# Altium PCB USBC.PcbDoc
Units mm, origin at the board's own origin, x right, y up, seen from the top; angles counter-clockwise.
Board outline 23.9 x 69.4 mm, 2 copper layers (Top Layer, Bottom Layer), stack 0.77 mm thick; 42 components, 36 nets, 209 pads, 199 vias.
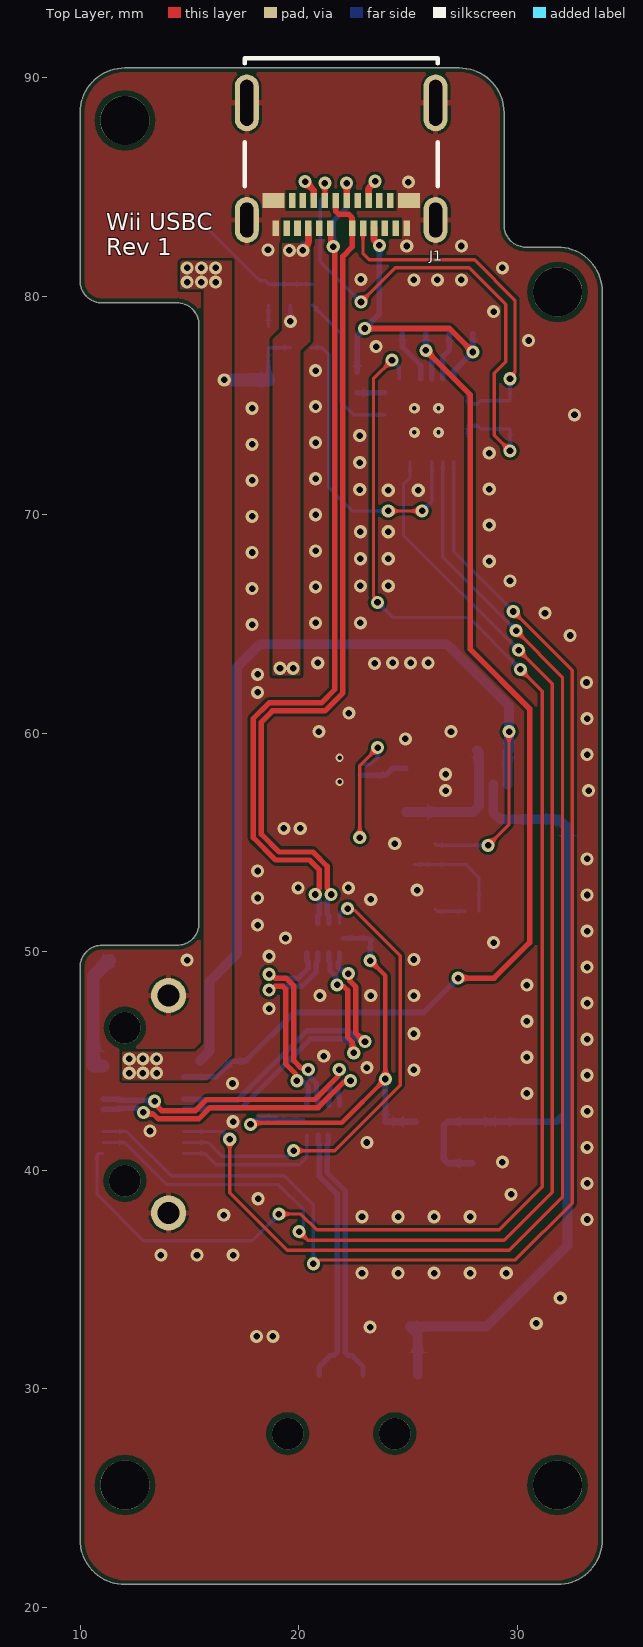
[diagram p0: Top Layer view]
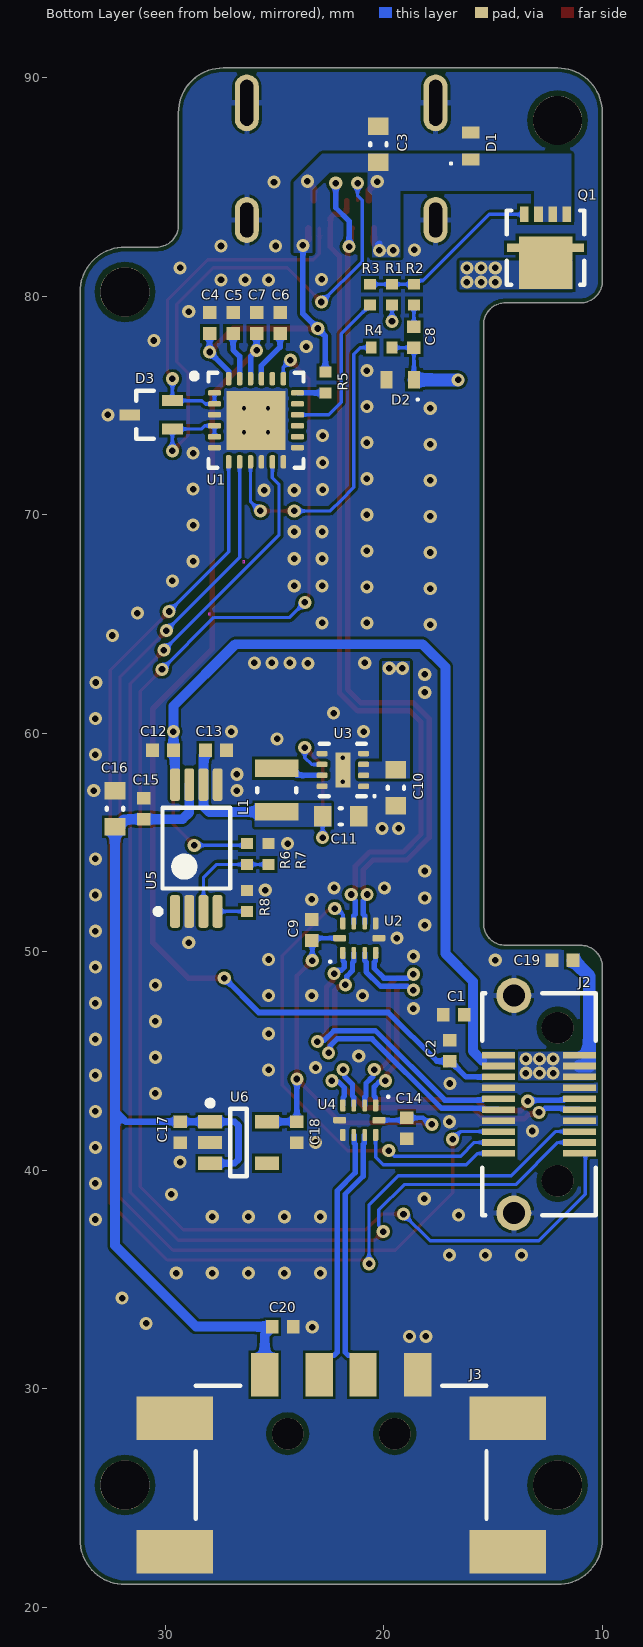
[diagram p1: Bottom Layer view, seen from below]
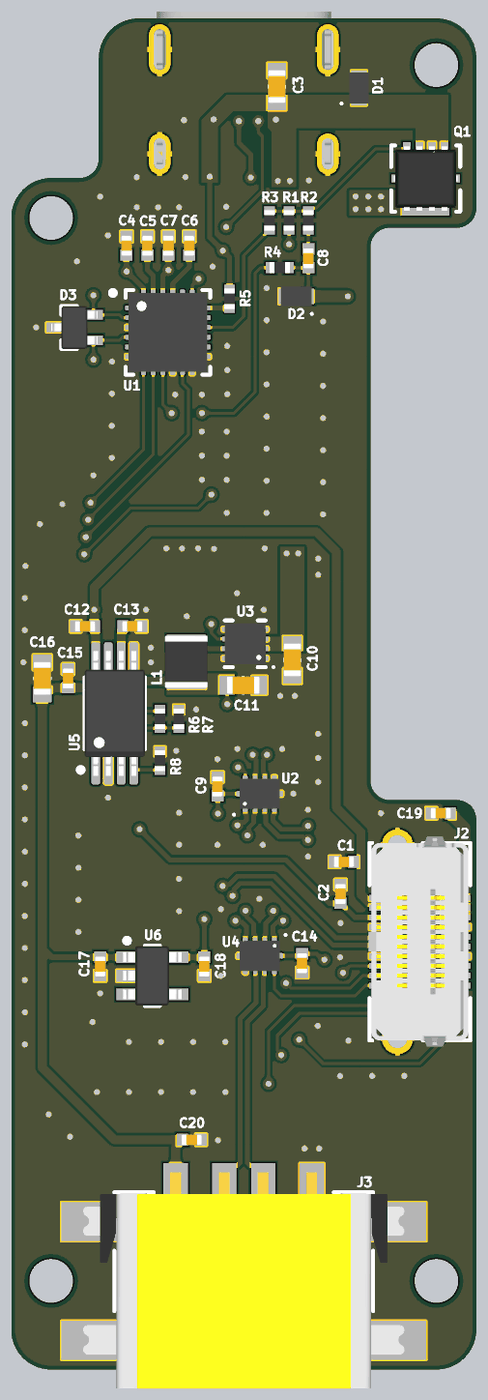
[diagram p2: 3D render of the assembled board from below, using the file's embedded part models]

## Layer stack, top to bottom
Top Solder: solder mask 0.0127, Solder Resist, Dk 3.8
Top Layer: signal copper 0.035
Dielectric: core 0.7, FR-4, Dk 4.5
Bottom Layer: signal copper 0.035
Bottom Solder: solder mask 0.0127, Solder Resist, Dk 3.8

## Board outline
10,23.1 10,49.3 cw(c11,49.3) 11,50.3 14.438,50.3 ccw(c14.438,51.3) 15.438,51.3 15.438,78.7 ccw(c14.438,78.7) 14.438,79.7 11,79.7 cw(c11,80.7) 10,80.7 10,88.4 cw(c12.05,88.4) 12.05,90.45 27.35,90.45 cw(c27.35,88.4) 29.4,88.4 29.4,83.25 ccw(c30.4,83.25) 30.4,82.25 31.85,82.25 cw(c31.85,80.2) 33.9,80.2 33.9,23.1 cw(c31.85,23.1) 31.85,21.05 12.05,21.05 cw(c12.05,23.1)

## Design rules (kind name [scope] priority, off if disabled: settings)
BoardOutlineClearance BoardOutlineClearance_Silk [OnLayer('Top Overlay') OR OnLayer('Bottom Overlay')] p1: gap=0 ignorepadtopadclearanceinfootprint=FALSE
BoardOutlineClearance [All] p2: gap=0.2 ignorepadtopadclearanceinfootprint=FALSE
Clearance [All] p1: gap=0.127 ignorepadtopadclearanceinfootprint=FALSE except(0.25: Arc-Hole Track-Hole SMDPad-Hole THPad-Hole Via-Hole Fill-Hole Poly-Hole Region-Hole Text-Hole)
ComponentClearance [All] p1: gap=0.127 collisioncheckmode=3 verticalgap=0.127 showdistances=TRUE
DiffPairsRouting DiffPairsRouting_USB [All] p1: maxlimit=0.254 minlimit=0.127 mostfreqgap=0.127 toplayer_minwidth=0.244 toplayer_maxwidth=0.381 toplayer_prefwidth=0.244 bottomlayer_minwidth=0.244 bottomlayer_maxwidth=0.381 bottomlayer_prefwidth=0.244 impedanceprofiledriven=TRUE impedanceprofileid={C5C9464D-4472-4F4D-9DE4-98FA9F9132ED} impedanceprofilevalue=90.000000 maxuncoupledlength=12.7
DiffPairsRouting [All] p2: maxlimit=0.254 minlimit=0.127 mostfreqgap=0.127 toplayer_minwidth=0.127 toplayer_maxwidth=25.4 toplayer_prefwidth=0.127 bottomlayer_minwidth=0.127 bottomlayer_maxwidth=25.4 bottomlayer_prefwidth=0.127 maxuncoupledlength=12.7
Height [All] p1: minheight=0 maxheight=1816.048 prefheight=12.7
HoleSize [All] p1: absolutevalues=TRUE maxlimit=6.3 minlimit=0.3 maxpercent=80.000 minpercent=20.000
HoleToHoleClearance [All] p1: gap=0.25 allowstackedmicrovias=FALSE
MinimumAnnularRing [All] p1: minimumring=0.076
MinimumSolderMaskSliver [All] p1: minsoldermaskwidth=0
PlaneClearance [All] p1: clearance=0.127
PlaneConnect PlaneConnectPowerPads [InPadClass('PowerPads')] p1: planeconnectstyle=Direct reliefexpansion=0.508 reliefentries=4 reliefconductorwidth=0.254 reliefairgap=0.254
PlaneConnect [All] p2: pad.planeconnectstyle=Relief pad.reliefexpansion=0.3 pad.reliefentries=4 pad.reliefconductorwidth=0.127 pad.reliefairgap=0.127 via.planeconnectstyle=Direct via.reliefexpansion=0.3 via.reliefentries=4 via.reliefconductorwidth=0.127 via.reliefairgap=0.127
PolygonConnect PolygonConnectPowerPads [All vs (InPadClass('PowerPads'))] p1: connectstyle=Direct reliefconductorwidth=0.254 reliefentries=4 polygonreliefangle="90 Angle" airgapwidth=0.254
PolygonConnect [All] p2: thpad.connectstyle=Relief thpad.reliefconductorwidth=0.254 thpad.reliefentries=4 thpad.polygonreliefangle="90 Angle" thpad.airgapwidth=0.127 smdpad.connectstyle=Direct smdpad.reliefconductorwidth=0.127 smdpad.reliefentries=4 smdpad.polygonreliefangle="90 Angle" smdpad.airgapwidth=0.127 via.connectstyle=Direct via.reliefconductorwidth=0.127 via.reliefentries=4 via.polygonreliefangle="90 Angle" via.airgapwidth=0.127
RoutingVias [All] p1: holewidth=0.3 width=0.6 viastyle="Through Hole" minholewidth=0.3 minwidth=0.6 maxholewidth=0.6 maxwidth=6.6
SilkToSilkClearance [All] p1: silktosilkclearance=0
SilkToSolderMaskClearance [IsPad] p1: minsilkscreentomaskgap=0.127 clearancetoexposedcopper=TRUE
SolderMaskExpansion SolderMaskExpansion_Via [isVia] p1: expansion=0.102 istentingtop=TRUE
SolderMaskExpansion [All] p2: expansion=0.075 istentingtop=FALSE
Width [All] p1: maxlimit=25.4 minlimit=0.127 preferedwidth=0.127 minimp=50.000000 maximp=50.000000 favimp=50.000000
20 further rules are at their usual default settings.

## Classes and differential pairs
component class "Room Definition 12": C4 C5 C6 C7 D3 R5 U1
component class "Room Definition 10": C12 C13 C15 C16 R6 R7 R8 U5
component class "Room Definition 8": C14
component class "Room Definition 6": C9 U2
component class "Room Definition 4": C17 C18 U6
component class "Room Definition 2": C10 C11 L1 U3
differential pair WII_DATA: +WII_DATA_P -WII_DATA_N
differential pair USBCTOA_DATA: +USBCTOA_DATA_P -USBCTOA_DATA_N
differential pair USBC_DATA: +USBC_DATA_P -USBC_DATA_N
differential pair USBA_DATA: +USBA_DATA_P -USBA_DATA_N
differential pair MCU_DATA: +MCU_DATA_P -MCU_DATA_N

## Components (designator, comment, footprint, x,y, rotation, side; value= is the part's Value field where it differs from the comment)
C1 "Capacitor" CAPC1005X06N 16.8,47.125 r180 bottom value=1uF
C2 "Capacitor" CAPC1005X06N 16.975,45.475 r270 bottom value=0.1uF
C3 "Capacitor" CAPC1608X09N 20.25,86.95 r270 bottom value=4.7uF
C4 "Capacitor" CAPC1005X06N 27.975,78.775 r270 bottom value=1uF
C5 "Capacitor" CAPC1005X06N 26.9,78.775 r270 bottom value=1uF
C6 "Capacitor" CAPC1005X06N 24.75,78.775 r270 bottom value=1uF
C7 "Capacitor" CAPC1005X06N 25.825,78.775 r270 bottom value=1uF
C8 "Capacitor" CAPC1005X06N 18.625,78.125 r90 bottom value=0.1uF
C9 "Capacitor" CAPC1005X06N 23.3,51 r270 bottom value=0.1uF
C10 "Capacitor" CAPC1608X09N 19.45,57.5 r90 bottom value=10uF
C11 "Capacitor" CAPC1608X09N 21.975,56.2 r0 bottom value=22uF
C12 "Capacitor" CAPC1005X06N 30.105,59.225 r180 bottom value=0.1uF
C13 "Capacitor" CAPC1005X06N 27.68,59.225 r0 bottom value=0.1uF
C14 "Capacitor" CAPC1005X06N 18.95,41.92 r90 bottom value=0.1uF
C15 "Capacitor" CAPC1005X06N 30.98,56.55 r270 bottom value=0.1uF
C16 "Capacitor" CAPC1608X09N 32.305,56.55 r270 bottom value=10uF
C17 "Capacitor" CAPC1005X06N 29.325,41.75 r90 bottom value=1uF
C18 "Capacitor" CAPC1005X06N 23.975,41.75 r90 bottom value=1uF
C19 "Capacitor" CAPC1005X06N 11.825,49.625 r180 bottom value=1uF
C20 "Capacitor" CAPC1005X06N 24.625,32.85 r0 bottom value=1uF
D1 "ESDA25P35-1U1M" DFN105P160X60-2N 16.025,86.875 r90 bottom
D2 "ESDA25P35-1U1M" DFN105P160X60-2N 19.25,76.175 r0 bottom
D3 "ESDA25W" SOT65P210X110-3N 30.65,74.575 r0 bottom
J1 "105450-0101" 1054500101 21.95,86.85 r180 top
J2 "LSHM-110-02.5-L-DV-A-S-K-TR" LSHM-110-02.5-L-DV-A-S 12.9,43.025 r90 bottom
J3 "629104190121" 629104190121 21.95,25.05 r180 bottom
L1 "CIGT252010EH2R2MNE" INDC2520X10N 24.9,57.4 r270 bottom
Q1 "STL6P3LLH6" QFN0P315X300X90-10N 12.6,82.225 r0 bottom
R1 "Resistor" RESC1005X04N 19.625,80.075 r270 bottom value=100K
R2 "Resistor" RESC1005X04N 18.625,80.075 r90 bottom value=100
R3 "Resistor" RESC1005X04N 20.625,80.075 r90 bottom value=22k
R4 "Resistor" RESC1005X04N 20.1,77.65 r0 bottom value=1k
R5 "Resistor" RESC1005X04N 22.675,76.05 r90 bottom value=1k
R6 "Resistor" RESC1005X04N 26.255,54.475 r90 bottom value=100k
R7 "Resistor" RESC1005X04N 25.28,54.475 r270 bottom value=24.3k
R8 "Resistor" RESC1005X04N 26.255,52.325 r270 bottom value=500
U1 "STUSB4500QTR" QFN50P400X400X100_HS-25N 25.85,74.325 r180 bottom
U2 "TS3USB221RSER" QFN50P150X200X60-10N 21.125,50.625 r90 bottom
U3 "TPS62163DSGR" SON50P200X80_HS-9N 21.875,58.325 r0 bottom
U4 "TS3USB221RSER" QFN50P150X200X60-10N 21.125,42.295 r270 bottom
U5 "TPS2110APWR" TSOP65P640X120-8N 28.58,54.75 r90 bottom
U6 "TLV75533PDBVR" SOT95P280X145-5N 26.65,41.275 r180 bottom

## Footprints (in the part's own frame and the unit in brackets; to place one, negate y for a bottom-side part, rotate by r counter-clockwise, add the part's x,y. Pads: shape width x height; smd on the part's side, far side on the other; paste and mask are expansions set on the pad)
1054500101 [mm] "CONN RCP USB3.1 TYPEC 24P SMD RA"
  rect 0.3x0.7 smd: A1(-3,3.74) A2(-2.5,3.74) A3(-2,3.74) A4(-1.5,3.74) A5(-1,3.74) A6(-0.5,3.74) A7(0.5,3.74) A8(1,3.74) A9(1.5,3.74) A10(2,3.74) A11(2.5,3.74) A12(3,3.74) B2(2.25,2.47) B3(1.75,2.47) B4(1.25,2.47) B5(0.75,2.47) B6(0.25,2.47) B7(-0.25,2.47) B8(-0.75,2.47) B9(-1.25,2.47) B10(-1.75,2.47) B11(-2.25,2.47)
  rect 1x0.7 smd: B1(3.1,2.47) B12(-3.1,2.47)
  oval 1.1x2.1 hole 1.6 slot 0.6 at 0 deg: SHIELD(-4.32,3.36) SHIELD(4.32,3.36)
  oval 1.1x2.6 hole 2.1 slot 0.6 at 0 deg: SHIELD(-4.32,-2) SHIELD(4.32,-2)
  silkscreen extent -4.42,-4.05 4.42,1.81, body extent -4.47,-3.95 4.47,3.95, height 3.2
629104190121 [mm] "CONN RCPT USB2.0 TYPEA 4P SMD RA"
  rect 1.25x2 smd: 1(-3.5,5.6) 2(-1,5.6) 3(1,5.6) 4(3.5,5.6)
  rect 3.5x2 smd: SHIELD(-7.625,-2.5) SHIELD(-7.625,3.6) SHIELD(7.625,-2.5) SHIELD(7.625,3.6)
  round 1.45 hole 1.45 unplated: ""(-2.45,2.9) ""(2.45,2.9)
  silkscreen extent -6.65,-1 6.65,5.1, body extent -8.25,-4.98 8.25,6.13, height 6.32
CAPC1005X06N [mm] "Chip Capacitor, 2-Leads, Body 1.00x0.50mm, IPC Medium Density"
  rect 0.58x0.62 smd: 1(-0.48,0) 2(0.48,0)
  body extent -0.53,-0.28 0.53,0.27, height 0.55
CAPC1608X09N [mm] "Chip Capacitor, 2-Leads, Body 1.60x0.80mm, IPC Medium Density"
  rect 0.8x0.95 smd: 1(-0.825,0) 2(0.825,0)
  silkscreen extent -0.05,-0.38 0.05,0.38, body extent -0.85,-0.45 0.85,0.45, height 0.9
DFN105P160X60-2N [mm] "DFN, 2-Leads, Body 1.00x1.60mm, Pitch 1.05mm, IPC Medium Density"
  rect 0.55x0.8 smd: 1(-0.625,0) 2(0.625,0)
  silkscreen extent -0.85,0.85 -0.75,0.95, body extent -0.8,-0.5 0.8,0.5, height 0.6
INDC2520X10N [mm] "Chip Inductor, 2-Leads, Body 2.50x2.00mm, IPC Medium Density"
  rect 0.8x2 smd: 1(-1,0) 2(1,0)
  silkscreen extent -0.1,-0.9 0.1,0.9, body extent -1.35,-1.1 1.35,1.1, height 1
LSHM-110-02.5-L-DV-A-S [mm] "CONN SELF-MATE 20POS SMD GOLD"
  rect 0.3x1.5 smd: 1(2.25,-1.85) 2(2.25,1.85) 3(1.75,-1.85) 4(1.75,1.85) 5(1.25,-1.85) 6(1.25,1.85) 7(0.75,-1.85) 8(0.75,1.85) 9(0.25,-1.85) 10(0.25,1.85) 11(-0.25,-1.85) 12(-0.25,1.85) 13(-0.75,-1.85) 14(-0.75,1.85) 15(-1.25,-1.85) 16(-1.25,1.85) 17(-1.75,-1.85) 18(-1.75,1.85) 19(-2.25,-1.85) 20(-2.25,1.85)
  round 1.6 hole 1: SHIELD(-4.975,1.15) SHIELD(4.975,1.15)
  round 1.45 hole 1.45 unplated: ""(-3.5,-0.85) ""(3.5,-0.85)
  silkscreen extent -5.07,-2.59 5.07,2.59, body extent -5.4,-2.49 5.4,2.64, height 3.93
QFN0P315X300X90-10N [mm] "QFN, 10-Leads, Body 3.15x3.00mm, Pitch 0.65mm/0.00mm, IPC Medium Density"
  rect 0.4x0.7 smd: 1(-0.975,-1.525) 2(-0.325,-1.525) 3(0.325,-1.525) 4(0.975,-1.525) 5(0.975,1.525) 6(0.325,1.525) 7(-0.325,1.525) 8(-0.975,1.525)
  rect 0.7x0.4 smd: 5(-1.405,0) 5(1.405,0)
  rect 2.45x2.4 smd: 5(0,0.7)
  silkscreen extent -1.78,-1.7 1.78,1.7, body extent -1.65,-1.65 1.65,1.65, height 0.8
QFN50P150X200X60-10N [mm] "QFN, 10-Leads, Body 1.50x2.00mm, Pitch 0.50mm, IPC Medium Density"
  rrect50% 0.55x0.25 smd: 1(-0.675,0.75) 4(-0.675,-0.75) 6(0.675,-0.75) 9(0.675,0.75)
  rrect50% 0.55x0.2 smd: 2(-0.675,0.25) 3(-0.675,-0.25) 7(0.675,-0.25) 8(0.675,0.25)
  rrect50% 0.3x0.6 smd: 5(0,-0.9) 10(0,0.9)
  silkscreen extent -1.12,1.28 -1.03,1.38, body extent -0.78,-1.03 0.78,1.03, height 0.6
QFN50P400X400X100_HS-25N [mm] "QFN, 24-Leads, Body 4.00x4.00mm, Pitch 0.50mm, Thermal Pad 2.70x2.70mm, IPC Medium Density"
  rrect50% 0.6x0.25 smd: 1(-1.9,1.25) 2(-1.9,0.75) 3(-1.9,0.25) 4(-1.9,-0.25) 5(-1.9,-0.75) 6(-1.9,-1.25) 13(1.9,-1.25) 14(1.9,-0.75) 15(1.9,-0.25) 16(1.9,0.25) 17(1.9,0.75) 18(1.9,1.25)
  rrect50% 0.25x0.6 smd: 7(-1.25,-1.9) 8(-0.75,-1.9) 9(-0.25,-1.9) 10(0.25,-1.9) 11(0.75,-1.9) 12(1.25,-1.9) 19(1.25,1.9) 20(0.75,1.9) 21(0.25,1.9) 22(-0.25,1.9) 23(-0.75,1.9) 24(-1.25,1.9)
  rect 2.7x2.7 smd: 25(0,0)
  silkscreen extent -2.95,-2.18 2.18,2.17, body extent -2.03,-2.03 2.03,2.03, height 1
RESC1005X04N [mm] "Chip Resistor, 2-Leads, Body 1.00x0.50mm, IPC Medium Density"
  rect 0.5x0.55 smd: 1(-0.475,0) 2(0.475,0)
  body extent -0.52,-0.28 0.53,0.27, height 0.4
SON50P200X80_HS-9N [mm] "SON, 8-Leads, Body 2.00x2.00mm, Pitch 0.50mm, Thermal Pad 1.60x0.69mm, IPC Medium Density"
  rrect50% 0.5x0.25 smd mask+0.07: 1(-0.95,0.75) 2(-0.95,0.25) 3(-0.95,-0.25) 4(-0.95,-0.75) 5(0.95,-0.75) 6(0.95,-0.25) 7(0.95,0.25) 8(0.95,0.75)
  rect 0.69x1.6 smd mask+0.07: 9(0,0)
  silkscreen extent -1.5,-1.2 1.05,1.25, body extent -1.05,-1.05 1.05,1.05, height 0.8
SOT65P210X110-3N [mm] "SOT23, 3-Leads, Body 2.00x2.10mm, Pitch 0.65mm, IPC Medium Density"
  rect 0.95x0.5 smd: 1(-0.975,0.65) 2(-0.975,-0.65) 3(0.975,0)
  silkscreen extent -0.13,-1.1 0.67,1.1, body extent -1.2,-1.1 1.2,1.1, height 1.1
SOT95P280X145-5N [mm] "SOT23, 5-Leads, Body 2.90x2.80mm, Pitch 0.95mm, IPC Medium Density"
  rect 1.1x0.6 smd: 1(-1.3,0.95) 2(-1.3,0) 3(-1.3,-0.95) 4(1.3,-0.95) 5(1.3,0.95)
  silkscreen extent -1.43,-1.55 0.38,1.92, body extent -1.5,-1.53 1.5,1.53, height 1.45
TSOP65P640X120-8N [mm] "TSOP, 8-Leads, Body 3.00x4.40mm, Pitch 0.65mm, IPC Medium Density"
  rrect50% 1.5x0.45 smd: 1(-2.9,0.975) 2(-2.9,0.325) 3(-2.9,-0.325) 4(-2.9,-0.975) 5(2.9,-0.975) 6(2.9,-0.325) 7(2.9,0.325) 8(2.9,0.975)
  silkscreen extent -3.02,-1.55 1.85,1.88, body extent -3.2,-1.55 3.2,1.55, height 1.2

## Part data
C1 C2 C4 C5 C6 C7 C8 C9 C12 C13 C14 C15 C17 C18 C19 C20: "General purpose capacitor", Package=0402, Rated Voltage=25V
C3 C10 C16: "General purpose capacitor", Package=0603, Rated Voltage=25V
C11: "General purpose capacitor", Package=0603, Rated Voltage=10V
D1 D2: "STMICROELECTRONICS - ESDA25P35-1U1M - ESD Protection Device, Unidirectional, 41 V, QFN, 2 Pins", Case/Package=1610, Clamping Voltage=41V, Manufacturer=STMicroelectronics, Max Operating Temperature=150°C, Min Breakdown Voltage=23.3V, Min Operating Temperature=-55°C, Peak Pulse Current=35A, Peak Pulse Power=1.4kW, Power Line Protection=No, Reverse Standoff Voltage=22V, Category="TVS Diodes", ComponentLink1Description=http://www.farnell.com/datasheets/2236209.pdf?src-supplier=Farnell, ComponentLink1URL=http://www.farnell.com/datasheets/2236209.pdf?src-supplier=Farnell, ComponentLink2Description=http://www.st.com/content/ccc/resource/technical/document/datasheet/group3/e4/43/53/b9/4e/8a/40/bb/DM00312034/files/DM00312034.pdf/jcr:content/translations/en.DM00312034.pdf?src-supplier=Digi-Key, ComponentLink2URL=http://www.st.com/content/ccc/resource/technical/document/datasheet/group3/e4/43/53/b9/4e/8a/40/bb/DM00312034/files/DM00312034.pdf/jcr:content/translations/en.DM00312034.pdf?src-supplier=Digi-Key, ComponentLink3Description=http://www.farnell.com/datasheets/2236209.pdf?src-supplier=Element14, ComponentLink3URL=http://www.farnell.com/datasheets/2236209.pdf?src-supplier=Element14, ComponentLink4Description=http://www.farnell.com/datasheets/2236209.pdf?src-supplier=Newark, ComponentLink4URL=http://www.farnell.com/datasheets/2236209.pdf?src-supplier=Newark, Composition=Zener, Manufacturer Part Number=ESDA25P35-1U1M, Mount="Surface Mount", Number of Pins=2, Number of Unidirectional Channels=1, Packaging="Tape and Reel", Pricing 1="1=0.45000, 10=0.36200, 25=0.33120, 100=0.20790, 250=0.20560, 500=0.19250, 1000=0.13090, 2500=0.12551 (USD)", RoHS=No, Stock 1=4234, Supplier 1=Digi-Key
D3: "STMICROELECTRONICS - ESDA25W - ESD Protection Device, Array, SOT-323, 3 Pins, 1.2 V, 400 W, ESDA2 Series", Breakdown Voltage=25V, Capacitance=65pF, Case/Package=SOT-323, Leakage Current=1uA, Manufacturer=STMicroelectronics, Max Breakdown Voltage=30V, Max Operating Temperature=125°C, Max Power Dissipation=400W, Min Operating Temperature=-40°C, Operating Supply Voltage=1.2V, Package Quantity=1, Power Line Protection=No, Reverse Standoff Voltage=24V, Test Current=1mA, Category="Integrated Circuits (ICs)", ComponentLink1Description=https://datasheet.ciiva.com/15143/getdatasheetpartid-144665-15143734.pdf?src-supplier=Verical, ComponentLink1URL=https://datasheet.ciiva.com/15143/getdatasheetpartid-144665-15143734.pdf?src-supplier=Verical, ComponentLink2Description=https://datasheet.ciiva.com/16216/cd00064033-16216903.pdf?src-supplier=Future+Electronics, ComponentLink2URL=https://datasheet.ciiva.com/16216/cd00064033-16216903.pdf?src-supplier=Future+Electronics, ComponentLink3Description=https://datasheet.ciiva.com/26787/esda25w-26787589.pdf?src-supplier=IIIC, ComponentLink3URL=https://datasheet.ciiva.com/26787/esda25w-26787589.pdf?src-supplier=IIIC, ComponentLink4Description=https://datasheet.ciiva.com/338/cd00064033-338272.pdf?src-supplier=Digi-Key, ComponentLink4URL=https://datasheet.ciiva.com/338/cd00064033-338272.pdf?src-supplier=Digi-Key, ComponentLink5Description=https://datasheet.ciiva.com/338/cd00064033-338273.pdf?src-supplier=Digi-Key, ComponentLink5URL=https://datasheet.ciiva.com/338/cd00064033-338273.pdf?src-supplier=Digi-Key, ComponentLink6Description=https://datasheet.ciiva.com/4510/cd00064033-4510575.pdf?src-supplier=Mouser, ComponentLink6URL=https://datasheet.ciiva.com/4510/cd00064033-4510575.pdf?src-supplier=Mouser, ComponentLink7Description=https://datasheet.ciiva.com/28474/1671027-28474846.pdf?src-supplier=Element14, ComponentLink7URL=https://datasheet.ciiva.com/28474/1671027-28474846.pdf?src-supplier=Element14, ComponentLink8Description=https://datasheet.ciiva.com/338/cd00064033-338271.pdf?src-supplier=Digi-Key, ComponentLink8URL=https://datasheet.ciiva.com/338/cd00064033-338271.pdf?src-supplier=Digi-Key, Composition=Zener, Depth=1.25mm, Direction=Unidirectional, Element Configuration="Common Anode", ESD Protection=Yes, Height=1.1mm, Lead Free="Lead Free", Length=2mm, Manufacturer Part Number=ESDA25W, Max Reverse Leakage Current=1uA, Min Breakdown Voltage=25V, Mount="Surface Mount", Number of Channels=2, Number of Elements=2, Number of Pins=3, Number of Unidirectional Channels=2, Packaging="Tape and Reel", Peak Pulse Power=400W, Polarity=Unidirectional, Pricing 1="1=0.40000, 10=0.32600, 25=0.29800, 100=0.18710, 250=0.18504, 500=0.17326, 1000=0.11781 (USD)", Radiation Hardening=No, REACH SVHC="No SVHC", Reverse Breakdown Voltage=25V, RoHS=Yes, Supplier 1=Digi-Key, Termination=SMD/SMT, Voltage Rating (DC)=25V, Width=1.25mm, Working Voltage=24V
J1: "USB Shielded I/O Receptacle; Type C; Right Angle; Surface Mount; Gold over Nickel", Case/Package=0101, Current Rating=5A, Flammability Rating="UL94 V-0", Insulation Color=Black, Manufacturer=Molex, Max Operating Temperature=85°C, Min Operating Temperature=-30°C, Category=Connectors, ComponentLink1Description=http://www.farnell.com/datasheets/2801634.pdf?src-supplier=Farnell, ComponentLink1URL=http://www.farnell.com/datasheets/2801634.pdf?src-supplier=Farnell, ComponentLink2Description=http://www.farnell.com/datasheets/2672741.pdf?src-supplier=Newark, ComponentLink2URL=http://www.farnell.com/datasheets/2672741.pdf?src-supplier=Newark, ComponentLink3Description=http://www.farnell.com/datasheets/2015275.pdf?src-supplier=Element14, ComponentLink3URL=http://www.farnell.com/datasheets/2015275.pdf?src-supplier=Element14, ComponentLink4Description=https://www.molex.com/pdm_docs/ps/PS-105448-001.pdf?src-supplier=Digi-Key, ComponentLink4URL=https://www.molex.com/pdm_docs/ps/PS-105448-001.pdf?src-supplier=Digi-Key, ComponentLink5Description=http://www.farnell.com/datasheets/2801634.pdf?src-supplier=Newark, ComponentLink5URL=http://www.farnell.com/datasheets/2801634.pdf?src-supplier=Newark, ComponentLink6Description=https://www.molex.com/pdm_docs/sd/1054500101_sd.pdf?src-supplier=Digi-Key, ComponentLink6URL=https://www.molex.com/pdm_docs/sd/1054500101_sd.pdf?src-supplier=Digi-Key, ComponentLink7Description=http://www.farnell.com/datasheets/2801634.pdf?src-supplier=Element14, ComponentLink7URL=http://www.farnell.com/datasheets/2801634.pdf?src-supplier=Element14, ComponentLink8Description=http://www.literature.molex.com/SQLImages/kelmscott/Molex/PDF_Images/987651-4081.PDF?src-supplier=Avnet, ComponentLink8URL=http://www.literature.molex.com/SQLImages/kelmscott/Molex/PDF_Images/987651-4081.PDF?src-supplier=Avnet, ComponentLink9Description=http://www.literature.molex.com/SQLImages/kelmscott/Molex/PDF_Images/987651-4081.PDF?src-supplier=Avnet+Asia, ComponentLink9URL=http://www.literature.molex.com/SQLImages/kelmscott/Molex/PDF_Images/987651-4081.PDF?src-supplier=Avnet+Asia, Connector Type=USB, Contact Material="Copper Alloy", Contact Plating=Gold, Features=Shielded, Gender=Receptacle, Housing Material=Thermoplastic, Length=8.94mm, Manufacturer Part Number=105450-0101, Mating Cycles=10000, Mount="Surface Mount,Through Hole,Horizontal", Number of Contacts=24, Number of Pins=24, Number of Ports=1, Number of Terminals=24, Orientation="Right Angle", Packaging="Tape and Reel", Pitch=0.5mm, Pricing 1="1=2.15000, 10=1.94900, 25=1.82960, 50=1.75000, 100=1.67050, 250=1.51140, 500=1.39208 (USD)", REACH SVHC=Unknown, RoHS=Yes, Shielding=Shielded, Stock 1=5403, Supplier 1=Digi-Key, Termination=Solder, USB Standard="USB 3.1"
J2: "HERMAPHRODITIC 0.50MM SMD 20POS 2.5MM", Manufacturer=Samtec, ComponentLink1Description=http://suddendocs.samtec.com/prints/lshm-1xx-xx.x-xx-dv-a-x-x-tr-mkt.pdf?src-supplier=Digi-Key, ComponentLink1URL=http://suddendocs.samtec.com/prints/lshm-1xx-xx.x-xx-dv-a-x-x-tr-mkt.pdf?src-supplier=Digi-Key, Connector Type=Non-Gendered, Contact Plating=Gold, Features=Shielded, Manufacturer Part Number=LSHM-110-02.5-L-DV-A-S-K-TR, Mated Stacking Heights=8.5mm, Mount="Surface Mount", Number of Positions=20, Number of Rows=2, Packaging="Tape and Reel", Pricing 1="1=5.89000, 10=5.65000, 25=5.17880, 50=4.94340, 100=4.70800, 250=4.11952 (USD)", RoHS=No, Stock 1=1318, Supplier 1=Digi-Key
J3: "WURTH ELEKTRONIK - 629104190121 - USB Connector, USB Type A, USB 2.0, Receptacle, 4 Positions, Surface Mount, Horizontal", Current Rating=1.5A, Flammability Rating="UL94 V-0", Insulation Color=Black, Manufacturer="Wurth Electronics", Max Operating Temperature=85°C, Min Operating Temperature=-40°C, ComponentLink1Description=https://katalog.we-online.de/em/datasheet/629104190121.pdf?src-supplier=Digi-Key, ComponentLink1URL=https://katalog.we-online.de/em/datasheet/629104190121.pdf?src-supplier=Digi-Key, Connector Type=USB, Contact Plating=Gold, Gender=Receptacle, Manufacturer Part Number=629104190121, Mating Cycles=1500, Mount="Surface Mount", Number of Contacts=4, Number of Ports=1, Packaging="Cut Tape", Pricing 1="1=1.41000, 10=1.18000, 50=1.03000, 100=0.94000 (USD)", RoHS=No, Shielding=Shielded, Stock 1=8348, Supplier 1=Digi-Key, Termination=Solder
L1: "FIXED IND 2.2UH 2.4A 80MOHM SMD", Case Code (Imperial)=1008, Case Code (Metric)=2520, Current Rating=2.4A, DC Resistance (DCR)=80mR, Inductance=2.2uH, Manufacturer=Samsung, Max Operating Temperature=125°C, Min Operating Temperature=-40°C, Saturation Current=2.7A, Test Frequency=1MHz, Tolerance=20%, Case/Package=1008, ComponentLink1Description=http://www.samsungsem.com/kr/support/product-search/inductor/CIGT252010EH2R2MNE.jsp?src-supplier=Digi-Key, ComponentLink1URL=http://www.samsungsem.com/kr/support/product-search/inductor/CIGT252010EH2R2MNE.jsp?src-supplier=Digi-Key, Composition="Thin Film", Core Material=Metal,Composite, Manufacturer Part Number=CIGT252010EH2R2MNE, Mount="Surface Mount", Packaging="Tape and Reel", Pricing 1="1=0.28000, 10=0.25300, 100=0.17390, 500=0.14864, 1000=0.11385 (USD)", RoHS=No, Shielding=Unshielded, Stock 1=35283, Supplier 1=Digi-Key
Q1: "MOSFET POWER MOSFET", Continuous Drain Current (ID)=6A, Drain to Source Voltage (Vdss)=30V, Input Capacitance=1.45nF, Manufacturer=STMicroelectronics, Max Power Dissipation=2.9W, Category=MOSFETs, ComponentLink1Description=http://www.mouser.com/ds/2/389/stl6p3llh6-956152.pdf?src-supplier=Mouser, ComponentLink1URL=http://www.mouser.com/ds/2/389/stl6p3llh6-956152.pdf?src-supplier=Mouser, ComponentLink2Description=http://www.st.com/content/ccc/resource/technical/document/datasheet/3c/90/16/29/a8/76/48/02/DM00064617.pdf/files/DM00064617.pdf/jcr:content/translations/en.DM00064617.pdf?src-supplier=Digi-Key, ComponentLink2URL=http://www.st.com/content/ccc/resource/technical/document/datasheet/3c/90/16/29/a8/76/48/02/DM00064617.pdf/files/DM00064617.pdf/jcr:content/translations/en.DM00064617.pdf?src-supplier=Digi-Key, ComponentLink3Description=http://www.st.com/st-web-ui/static/active/en/resource/technical/document/datasheet/DM00064617.pdf?src-supplier=Avnet, ComponentLink3URL=http://www.st.com/st-web-ui/static/active/en/resource/technical/document/datasheet/DM00064617.pdf?src-supplier=Avnet, Lead Free="Lead Free", Manufacturer Part Number=STL6P3LLH6, Mount="Surface Mount", Number of Pins=8, Packaging="Tape and Reel", Pricing 1="1=1.45000, 10=1.29800, 25=1.23200, 100=0.92400, 250=0.91520, 500=0.78320, 1000=0.63800 (USD)", Rds On Max=30mR, RoHS=Yes, Stock 1=129, Supplier 1=Digi-Key
R1 R2 R3 R4 R5 R6 R7 R8: "General purpose resistor", Package=0402
U1: "STAND-ALONE USB PD CONTROLLER (", Case/Package=QFN, Manufacturer=STMicroelectronics, Max Operating Temperature=105°C, Min Operating Temperature=-40°C, ComponentLink1Description=http://www.farnell.com/datasheets/2710898.pdf?src-supplier=Farnell, ComponentLink1URL=http://www.farnell.com/datasheets/2710898.pdf?src-supplier=Farnell, ComponentLink2Description=http://www.farnell.com/datasheets/2710898.pdf?src-supplier=Newark, ComponentLink2URL=http://www.farnell.com/datasheets/2710898.pdf?src-supplier=Newark, ComponentLink3Description=http://www.st.com/content/ccc/resource/technical/document/datasheet/group3/1c/4a/55/d7/17/01/44/86/DM00489312/files/DM00489312.pdf/jcr:content/translations/en.DM00489312.pdf?src-supplier=Digi-Key, ComponentLink3URL=http://www.st.com/content/ccc/resource/technical/document/datasheet/group3/1c/4a/55/d7/17/01/44/86/DM00489312/files/DM00489312.pdf/jcr:content/translations/en.DM00489312.pdf?src-supplier=Digi-Key, ComponentLink4Description=http://www.farnell.com/datasheets/2710898.pdf?src-supplier=Element14, ComponentLink4URL=http://www.farnell.com/datasheets/2710898.pdf?src-supplier=Element14, Interface=I2C, Manufacturer Part Number=STUSB4500QTR, Packaging="Tape and Reel", Pricing 1="1=2.11000, 10=1.79000, 100=1.43000, 500=1.25000, 1000=1.04000, 4000=0.93500, 8000=0.89900, 24000=0.86400 (USD)", RoHS=No, Stock 1=6187, Supplier 1=Mouser
U2 U4: "TEXAS INSTRUMENTS         TS3USB221RSER.             USB SWITCH, 480MBPS, 1.1GHZ, QFN-10", Case/Package=QFN, High Level Output Current=64mA, Manufacturer="Texas Instruments", Max Operating Temperature=85°C, Max Supply Voltage=3.6V, Min Operating Temperature=-40°C, Min Supply Voltage=2.3V, Nominal Supply Current=30uA, On-State Resistance=6R, Operating Supply Voltage=3V, Package Quantity=1, Bandwidth=1.1GHz, Category="USB Interface ICs", ComponentLink1Description=https://datasheet.ciiva.com/4924/scds220g-126796-4924322.pdf?src-supplier=Mouser, ComponentLink1URL=https://datasheet.ciiva.com/4924/scds220g-126796-4924322.pdf?src-supplier=Mouser, ComponentLink2Description=https://datasheet.ciiva.com/1505/1805933-1505289.pdf?src-supplier=Element14, ComponentLink2URL=https://datasheet.ciiva.com/1505/1805933-1505289.pdf?src-supplier=Element14, ComponentLink3Description=https://datasheet.ciiva.com/15126/getdatasheetpartid-48047-15126909.pdf?src-supplier=Verical, ComponentLink3URL=https://datasheet.ciiva.com/15126/getdatasheetpartid-48047-15126909.pdf?src-supplier=Verical, ComponentLink4Description=https://datasheet.ciiva.com/41461/001187309-da-01-en-ic-usb-switch-ts3usb221rser-uqfn-10-tid-41461683.pdf?src-supplier=Conrad, ComponentLink4URL=https://datasheet.ciiva.com/41461/001187309-da-01-en-ic-usb-switch-ts3usb221rser-uqfn-10-tid-41461683.pdf?src-supplier=Conrad, ComponentLink5Description=https://datasheet.ciiva.com/1672/ts3usb221-1672054.pdf?src-supplier=Digi-Key, ComponentLink5URL=https://datasheet.ciiva.com/1672/ts3usb221-1672054.pdf?src-supplier=Digi-Key, ComponentLink6Description=https://datasheet.ciiva.com/6636/ts3usb221-6636809.pdf?src-supplier=Digi-Key, ComponentLink6URL=https://datasheet.ciiva.com/6636/ts3usb221-6636809.pdf?src-supplier=Digi-Key, ComponentLink7Description=https://datasheet.ciiva.com/1505/1882068-1505181.pdf?src-supplier=Element14, ComponentLink7URL=https://datasheet.ciiva.com/1505/1882068-1505181.pdf?src-supplier=Element14, ComponentLink8Description=https://datasheet.ciiva.com/1672/ts3usb221-1672053.pdf?src-supplier=Digi-Key, ComponentLink8URL=https://datasheet.ciiva.com/1672/ts3usb221-1672053.pdf?src-supplier=Digi-Key, ComponentLink9Description=https://datasheet.ciiva.com/22694/1882068-22694357.pdf?src-supplier=Element14, ComponentLink9URL=https://datasheet.ciiva.com/22694/1882068-22694357.pdf?src-supplier=Element14, Contact Plating=Gold, Data Rate=480Mbps, Height=0.55mm, Lead Free="Lead Free", Length=1.5mm, Manufacturer Part Number=TS3USB221RSER, Number of Channels=2, Number of Inputs=4, Number of Outputs=2, Number of Pins=10, Number of Ports=2, Operating Supply Current=30uA, Packaging="Tape and Reel", Pricing 1="1=1.12000, 10=1.00300, 25=0.95200, 100=0.73100, 250=0.64600, 500=0.61200, 1000=0.47600 (USD)", Radiation Hardening=No, REACH SVHC="No SVHC", RoHS=Yes, Stock 1=22769, Supplier 1=Digi-Key, Supply Type=Single, Turn-Off Delay Time=12ns, Turn-On Delay Time=30ns, USB Standard="USB 2.0", Weight=0.000247oz, Width=2mm
U3: "3V-17V 1A Step-Down Converters with DCS-Control? 8-WSON -40 to 125", Case/Package=SOIC, Manufacturer="Texas Instruments", Max Input Voltage=17V, Max Operating Temperature=125°C, Max Output Current=1A, Max Output Voltage=5V, Min Input Voltage=3V, Min Operating Temperature=-40°C, Package Quantity=1, Quiescent Current=17uA, Switching Frequency=2.25MHz, Category="Power Supply Modules", ComponentLink1Description=https://datasheet.ciiva.com/4880/slvsam2a-198231-4880752.pdf?src-supplier=Mouser, ComponentLink1URL=https://datasheet.ciiva.com/4880/slvsam2a-198231-4880752.pdf?src-supplier=Mouser, ComponentLink2Description=https://datasheet.ciiva.com/2034/tps62160-2034672.pdf?src-supplier=Digi-Key, ComponentLink2URL=https://datasheet.ciiva.com/2034/tps62160-2034672.pdf?src-supplier=Digi-Key, ComponentLink3Description=https://datasheet.ciiva.com/2034/tps62160-2034673.pdf?src-supplier=Digi-Key, ComponentLink3URL=https://datasheet.ciiva.com/2034/tps62160-2034673.pdf?src-supplier=Digi-Key, ComponentLink4Description=https://datasheet.ciiva.com/2034/tps62160-2034674.pdf?src-supplier=Digi-Key, ComponentLink4URL=https://datasheet.ciiva.com/2034/tps62160-2034674.pdf?src-supplier=Digi-Key, Contact Plating=Gold, Lead Free="Lead Free", Manufacturer Part Number=TPS62163DSGR, Min Output Voltage=5V, Number of Outputs=1, Number of Pins=8, Operating Supply Voltage=17V, Output Configuration=Positive, Output Current=1A, Output Type=Fixed, Output Voltage=5V, Packaging="Tape and Reel", Pricing 1="1=1.58000, 10=1.42300, 25=1.34240, 100=1.07400, 250=0.93976, 500=0.91290, 1000=0.72495 (USD)", REACH SVHC="No SVHC", RoHS=Yes, Stock 1=10746, Supplier 1=Digi-Key, Synchronous Rectifier=Yes
U5: "IC OR CTRLR SRC SELECT 8TSSOP", Case/Package=TSSOP, Current - Output 2=750mA, Manufacturer="Texas Instruments", Max Input Voltage=5.5V, Max Operating Temperature=85°C, Min Input Voltage=2.8V, Min Operating Temperature=-40°C, On-State Resistance=120mR, Output Voltage=6V, Package Quantity=1, Category="Voltage Regulators - Switching", ComponentLink1Description=https://datasheet.ciiva.com/15109/getdatasheetpartid-508751-15109281.pdf?src-supplier=Verical, ComponentLink1URL=https://datasheet.ciiva.com/15109/getdatasheetpartid-508751-15109281.pdf?src-supplier=Verical, ComponentLink2Description=https://datasheet.ciiva.com/3232/tps2110a-3232502.pdf?src-supplier=Avnet, ComponentLink2URL=https://datasheet.ciiva.com/3232/tps2110a-3232502.pdf?src-supplier=Avnet, ComponentLink3Description=https://datasheet.ciiva.com/1960/tps2110a-1960807.pdf?src-supplier=Digi-Key, ComponentLink3URL=https://datasheet.ciiva.com/1960/tps2110a-1960807.pdf?src-supplier=Digi-Key, ComponentLink4Description=https://datasheet.ciiva.com/1960/tps2110a-1960808.pdf?src-supplier=Digi-Key, ComponentLink4URL=https://datasheet.ciiva.com/1960/tps2110a-1960808.pdf?src-supplier=Digi-Key, ComponentLink5Description=https://datasheet.ciiva.com/1960/tps2110a-1960809.pdf?src-supplier=Digi-Key, ComponentLink5URL=https://datasheet.ciiva.com/1960/tps2110a-1960809.pdf?src-supplier=Digi-Key, Lead Free="Lead Free", Manufacturer Part Number=TPS2110APWR, Max Output Current=750mA, Number of Inputs=2, Number of Outputs=1, Number of Pins=8, Operating Supply Voltage=5.5V, Output Current=750mA, Packaging="Tape and Reel", Pricing 1="1=2.34000, 10=2.09900, 25=1.98000, 100=1.58400, 250=1.38600, 500=1.34640, 1000=1.06920 (USD)", Radiation Hardening=No, REACH SVHC="No SVHC", RoHS=Yes, Stock 1=4089, Supplier 1=Digi-Key, Turn-On Delay Time=500us, Weight=0.001376oz
U6: "IC REG LINEAR 3.3V 500MA SOT23-5", Manufacturer="Texas Instruments", Max Operating Temperature=125°C, Min Operating Temperature=-40°C, ComponentLink1Description=http://www.ti.com/lit/ds/symlink/tlv755p.pdf?src-supplier=Digi-Key, ComponentLink1URL=http://www.ti.com/lit/ds/symlink/tlv755p.pdf?src-supplier=Digi-Key, Manufacturer Part Number=TLV75533PDBVR, Pricing 1="1=0.63000, 10=0.55100, 100=0.39250, 500=0.31730, 1000=0.24215 (USD)", RoHS=No, Stock 1=25120, Supplier 1=Digi-Key

## Free pads (board coordinates)
  round 2.25 hole 2.25 unplated: ""(12.05,25.6) ""(12.05,88.05) ""(31.85,25.6) ""(31.85,80.2)

## Via types
v1: diameter 0.6, hole 0.3, Top Layer to Bottom Layer, tented both sides, 193 vias
v2: diameter 0.5, hole 0.2, Top Layer to Bottom Layer, tented both sides, 4 vias
v3: diameter 0.381, hole 0.2, Top Layer to Bottom Layer, tented both sides, 2 vias

## Nets (pads, with @x,y where several pads share a name; then routed paths per layer and width w, separated by ;. In a path a pad name is that pad's centre, name@x,y a point inside that pad or via, vN(x,y) a via of type N, cw(c..) or ccw(c..) an arc to the next point about the centre after c; other vN are vias at no path point)
3V3_AO: C2.2 C7.2 J2.6 U1.22 | length 49.6
  Top Layer w0.254: v1(25.825,77.525) 27.85,75.5 27.85,63.85 30.575,61.125 30.575,50.425 28.95,48.8 v1(27.3,48.8)
  Bottom Layer w0.254: J2.6 16.235,44.275 16.955,44.995 C2.2 17.57,44.995 19.8,47.225 25.725,47.225 v1(27.3,48.8) ; C7.2 v1(25.825,77.525) 26.1,77.249 U1.22
3V3_MUX: C9.2 C14.2 C18.2 U2.10 U4.10 U6.5 | length 20.9
  Top Layer w0.203: v1(17.8,42.1) 17.875,42.175 21.969,42.175 v1(23.975,44.181) 23.975,48.9 v1(23.275,49.6)
  Bottom Layer w0.203: v1(17.8,42.1) 17.907,42.1 18.207,42.4 C14.2 19.055,42.295 U4.10 ; U2.10 23.195,50.625 C9.2 23.275,50.495 v1(23.275,49.6)
  Bottom Layer w0.254: C18.2 v1(23.975,44.181)
  Bottom Layer w0.305: C9.2 C9.2@23.307,50.512 ; C18.2 23.978,42.227 25.348,42.227 U6.5
5V_MUX: C15.2 C16.2 C17.2 C20.2 J3.1 U5.7 U6.1 U6.3 | length 44
  Bottom Layer w0.305: U6.3 26.829,40.325 26.65,40.504 26.65,42.046 26.829,42.225 U6.1 27.953,42.227 29.323,42.227 C17.2 31.81,42.23 32.305,42.725
  Bottom Layer w0.45: J3.1 25.45,32.485 25.105,32.83 C20.2 28.6,32.85 32.305,36.555 32.305,42.725 C16.2 32.23,55.725 31.885,56.07 C15.2 29.21,56.07 28.905,56.375 U5.7
5V_MUX_VSNS: R6.1 R7.2 U5.3 | length 4.8
  Bottom Layer w0.152: R7.2 R6.1 27.655,54 28.255,53.4 U5.3
5V_PMS: C1.2 C12.2 J2.2 J2.4 R6.2 U5.8 | length 44.4
  Top Layer w0.152: v1(28.675,54.875) 29.63,55.83 v1(29.63,60.075)
  Bottom Layer w0.152: R6.2 26.33,54.875 v1(28.675,54.875)
  Bottom Layer w0.45: 15.5,45.025 15.925,45.45 15.925,48.65 17.185,49.91 17.185,63.035 18.225,64.075 26.8,64.075 29.63,61.245 v1(29.63,60.075) 29.627,60.072 29.627,59.227 C12.2 29.56,59.16 29.56,59.01 29.555,59.005 U5.8
5V_USBC: C11.2 C13.2 L1.2 U3.6 U5.6 | length 12.9
  Top Layer w0.152: v1(22.8,55.225) 22.8,58.525 v1(23.618,59.343)
  Bottom Layer w0.152: v1(22.8,55.225) C11.2 ; U3.6 23.306,58.575 23.618,58.887 v1(23.618,59.343)
  Bottom Layer w0.45: L1.2 27.991,56.4 28.255,56.664 U5.6 28.255,58.98 28.225,59.01 28.225,59.16 C13.2
CABLE_DET: J2.17 U1.11 | length 60.5
  Top Layer w0.152: v1(20.025,37.2) 20.425,36.8 29.4,36.8 31.6,39 31.6,62.268 v1(30.065,63.804)
  Bottom Layer w0.152: J2.17 12.03,41.275 13.955,39.35 19.075,39.35 20.225,38.2 20.225,37.475 20.025,37.275 v1(20.025,37.2) ; U1.11 25.1,71.7 24.8,71.4 24.8,69.068 v1(30.065,63.804)
CC1: D3.2 J1.A5 U1.1 U1.2 | length 16.2
  Top Layer w0.152: J1.A5 22.95,81.95 23.225,81.675 28.05,81.675 29.901,79.824 29.901,76.539 29.675,76.314 v1(29.675,76.226)
  Bottom Layer w0.152: U1.1 U1.2 28.175,75.075 28.325,75.225 D3.2 v1(29.675,76.226)
CC2: D3.1 J1.B5 U1.4 U1.5 | length 25.8
  Top Layer w0.152: J1.B5 21.203,84.383 v1(21.203,85.175) ; v1(22.857,79.739) 24.418,81.3 27.8,81.3 29.475,79.625 29.475,77 28.95,76.475 28.95,73.65 v1(29.675,72.925)
  Bottom Layer w0.152: v1(21.203,85.175) 21.203,84.603 20.993,84.393 20.993,81.582 22.836,79.739 v1(22.857,79.739) ; U1.5 U1.4 28.2,74.075 28.35,73.925 D3.1 v1(29.675,72.925)
DISCH: R4.2 U1.9 | length 14.2
  Top Layer w0.152: v1(24.1,70.175) v1(25.65,70.175)
  Bottom Layer w0.152: R4.2 21.075,77.65 21.375,77.35 21.375,71.25 21.95,70.675 22.45,70.175 v1(24.1,70.175) ; v1@25.663,70.163 26.1,70.6 26.1,71.05 U1.9
GND: C1.1 C2.1 C3.1 C4.1 C5.1 C6.1 C7.1 C9.1 C10.1 C11.1 C12.1 C13.1 C14.1 C15.1 C16.1 C17.1 C18.1 C19.1 C20.1 D1.2 D2.2 D3.3 J1.A1 J1.A12 J1.B1 J1.B12 J1.SHIELD J2.7 J2.8 J2.13 J2.14 J2.SHIELD J3.4 J3.SHIELD R7.1 R8.1 U1.3 U1.6 U1.10 U1.12 U1.13 U1.25 U2.5 U2.6 U3.1 U3.4 U3.5 U3.8 U3.9 U4.5 U4.6 U5.2 U5.5 U6.2
  other v1: 18.075,32.4 18.825,32.4 23.275,32.825 30.875,33 31.975,34.15 22.9,35.3 24.55,35.3 26.2,35.3 27.85,35.3 29.5,35.3 13.7,36.125 15.35,36.125 17,36.125 33.2,37.75 22.9,37.875 24.55,37.875 26.2,37.875 27.85,37.875 16.575,37.95 18.15,38.7 29.725,38.9 33.2,39.4 29.325,40.375 33.2,41.05 23.125,41.275 13.2,41.8 17,42.225 33.2,42.7 30.45,43.525 16.975,43.975 33.2,44.35 25.275,44.6 23.125,44.7 30.45,45.175 21.15,45.225 33.2,46 25.275,46.25 30.45,46.825 18.65,47.4 33.2,47.65 20.975,48 23.3,48 25.275,48 30.45,48.475 33.2,49.3 14.9,49.625 25.275,49.65 18.65,49.8 28.925,50.425 19.4,50.625 33.2,50.95 18.125,51.225 23.3,52.4 18.125,52.463 33.2,52.6 25.425,52.825 19.975,52.925 22.275,52.925 18.125,53.7 33.2,54.25 24.4,54.95 19.325,55.65 20.075,55.65 26.725,57.375 33.275,57.375 26.725,58.125 33.2,59.025 24.884,59.744 20.925,60.075 26.975,60.075 33.2,60.675 22.3,60.925 18.125,61.875 33.175,62.325 18.125,62.7 23.475,63.2 20.875,63.225 24.3,63.225 25.125,63.225 25.925,63.225 32.425,64.475 17.875,64.975 20.775,65.05 22.825,65.05 31.275,65.5 17.875,66.625 20.775,66.7 22.825,66.75 24.1,66.75 29.675,66.975 28.725,67.875 22.825,67.987 24.1,67.987 17.875,68.275 20.775,68.35 22.825,69.225 24.1,69.225 28.725,69.525 17.875,69.925 20.775,70 24.1,71.125 25.475,71.125 22.8,71.15 28.725,71.175 17.875,71.575 20.775,71.65 22.8,72.388 28.725,72.825 17.875,73.225 20.775,73.3 22.8,73.625 32.625,74.575 17.875,74.875 20.775,74.95 20.775,76.6 23.55,77.7 30.525,77.975 28.925,79.3 25.275,80.75 26.35,80.75 27.45,80.75 22.85,80.775 29.325,81.3 18.6,82.125 24.95,82.3 27.45,82.3 25.025,85.225
  other v2: 25.3,73.775 26.4,73.775 25.3,74.875 26.4,74.875
  other v3: 21.875,57.775 21.875,58.875
MCU_DATA_N: J2.12 U2.2 | length 14.7
  Top Layer w0.244: v1(21.761,48.486) 21.829,48.418 22.068,48.418 22.25,48.236 22.25,46.082 22.457,45.875 22.457,45.443 v1(22.525,45.375)
  Bottom Layer w0.244: J2.12 14.778,42.803 15.435,42.803 15.473,42.842 17.362,42.842 20.537,46.016 22.136,46.016 22.457,45.695 22.457,45.443 v1(22.525,45.375) ; U2.2 21.375,49.57 21.434,49.511 21.434,49.14 21.693,48.882 21.693,48.554 v1(21.761,48.486)
MCU_DATA_P: J2.10 U2.1 | length 14.6
  Top Layer w0.244: v1(22.275,49) 22.343,48.932 22.343,48.667 22.621,48.389 22.621,46.267 22.998,45.889 v1(23.039,45.889)
  Bottom Layer w0.244: J2.10 14.778,43.247 15.435,43.247 15.469,43.212 17.209,43.212 20.383,46.387 22.289,46.387 22.719,45.957 22.971,45.957 v1(23.039,45.889) ; U2.1 21.872,49.947 21.872,49.584 21.804,49.517 21.804,49.294 21.947,49.151 22.124,49.151 v1(22.275,49)
NetC8_2: C8.2 R2.1 | length 1
  Bottom Layer w0.152: C8.2 R2.1
NetR3_1: R3.1 U1.16 | length 7.3
  Bottom Layer w0.152: R3.1 20.65,79.6 20.824,79.426 20.824,79.401 21.95,78.275 21.95,75.15 22.525,74.575 U1.16
NetR5_1: R5.1 U1.18 | length 1.3
  Bottom Layer w0.254: R5.1 U1.18
NetR8_2: R8.2 U5.4 | length 1.4
  Bottom Layer w0.152: R8.2@26.255,51.95 26.355,51.85 U5.4
PMS_DEBUG_N: J2.18 U2.9 | length 21.6
  Top Layer w0.152: v1(19.775,40.9) 21.65,40.9 24.65,43.9 24.65,49.825 22.561,51.914 22.309,51.914 v1(22.246,51.977)
  Bottom Layer w0.152: J2.18 15.854,41.275 16.479,40.65 19.525,40.65 v1(19.775,40.9) ; U2.9 21.875,51.725 22.127,51.977 v1(22.246,51.977)
PMS_PWR_ON: J2.20 U4.9 | length 7
  Bottom Layer w0.152: J2.20 15.7,40.775 16.225,40.25 20.035,40.25 20.375,40.59 U4.9
PMS_SCL: J2.15 U1.7 | length 62.9
  Top Layer w0.152: v1(20.675,35.725) 20.796,35.725 20.971,35.9 29.925,35.9 32.525,38.5 32.525,62.875 v1(29.825,65.575)
  Bottom Layer w0.152: J2.15 12.145,41.775 14.17,39.75 19.35,39.75 20.675,38.425 v1(20.675,35.725) ; U1.7 27.1,68.3 v1(29.825,65.575)
PMS_SDA: J2.16 U1.8 | length 57.9
  Top Layer w0.152: v1(16.85,41.425) 16.85,38.975 19.475,36.35 29.65,36.35 32.075,38.775 32.075,62.575 v1(29.95,64.7)
  Bottom Layer w0.152: J2.16 16.5,41.775 v1(16.85,41.425) ; U1.8 26.6,68.05 v1(29.95,64.7)
STUSB_INT: J2.19 U1.19 | length 69.4
  Top Layer w0.152: v1(19.1,38) 19.175,38 20.1,38 20.825,37.275 29.175,37.275 31.15,39.25 31.15,61.925 v1(30.15,62.925) ; v1(23.61,65.99) 23.61,66.111 23.425,66.296 23.425,76.225 v1(24.275,77.075)
  Bottom Layer w0.152: J2.19 10.838,40.775 10.775,40.712 10.775,38.9 12.9,36.775 17.875,36.775 v1(19.1,38) ; v1(23.61,65.99) 24.3,65.3 27.775,65.3 v1(30.15,62.925) ; v1(24.275,77.075) 24.6,76.75 U1.19
SW_5V: L1.1 U3.7 | length 2.2
  Bottom Layer w0.254: U3.7 23.975,58.075 24.3,58.4 L1.1
USBA_DATA_N: J3.2 U4.7 | length 11.8
  Bottom Layer w0.244: U4.7@21.353,41.62 21.353,41.236 21.31,41.193 21.31,39.89 22.135,39.065 22.135,31.671 22.278,31.528 22.447,31.528 22.95,31.025 J3.2
USBA_DATA_P: J3.3 U4.8 | length 11.8
  Bottom Layer w0.244: U4.8@20.897,41.62 20.897,41.236 20.94,41.193 20.94,39.736 21.765,38.911 21.765,31.671 21.622,31.528 21.453,31.528 20.95,31.025 J3.3
USBC_DATA_N: J1.A7 J1.B7 U2.7 | length 40.8
  Top Layer w0.244: v1(20.762,52.625) 20.762,52.721 20.939,52.899 20.939,53.761 20.5,54.2 18.95,54.2 17.925,55.225 17.925,60.675 18.646,61.396 21.046,61.396 21.655,62.005 21.655,71.833 21.655,82.303 21.478,82.48 21.478,83.082 J1.A7 ; J1.B7 v1(22.2,85.175)
  Bottom Layer w0.244: U2.7 20.875,51.662 20.94,51.727 20.94,52.197 ; 20.94,52.216 20.94,52.35 ; v1(21.586,82.275) 21.586,83.436 22.2,84.05 v1(22.2,85.175)
USBC_DATA_P: J1.A6 J1.B6 U2.8 | length 38.8
  Top Layer w0.244: v1(21.488,52.625) 21.488,52.721 21.31,52.899 21.31,53.914 20.654,54.571 19.104,54.571 18.296,55.379 18.296,60.521 18.8,61.025 21.2,61.025 22.026,61.851 22.026,71.987 22.026,81.829 22.45,82.253 J1.A6 22.443,83.117 22.443,83.607 22.3,83.75 21.843,83.75 21.7,83.893 J1.B6
  Bottom Layer w0.244: 21.311,52.351 21.311,52.197 21.31,51.727 21.375,51.662 U2.8
USBCTOA_DATA_N: U2.4 U4.2 | length 9.5
  Top Layer w0.244: v1(18.65,48.975) 18.746,48.975 18.925,48.797 19.424,48.797 19.784,48.437 19.784,45.018 20.119,44.682 20.371,44.682 v1(20.439,44.614)
  Bottom Layer w0.244: 18.925,48.797 19.997,48.797 20.44,49.24 20.44,49.523 20.378,49.584 20.378,49.947 U2.4 ; 20.507,44.282 20.616,44.173 ; 20.616,44.185 20.816,43.985 20.816,43.409 20.875,43.35 U4.2
USBCTOA_DATA_P: U2.3 U4.1 | length 9.5
  Top Layer w0.244: v1(18.65,48.248) 18.746,48.248 18.925,48.426 19.27,48.426 19.413,48.284 19.413,44.864 19.857,44.42 19.857,44.168 v1(19.925,44.1)
  Bottom Layer w0.244: 18.925,48.426 20.15,48.426 20.81,49.086 20.81,49.535 20.875,49.6 U2.3 ; 20.233,44.032 20.446,43.82 20.446,43.403 20.378,43.336 20.378,42.973 U4.1
VBUS: C3.2 C4.2 C10.2 D1.1 J1.A4 J1.A9 J1.B4 J1.B9 Q1.1 Q1.2 Q1.3 R1.2 R5.2 U1.24 U3.2 U3.3 | length 19.1
  Top Layer w0.254: v1(23.025,78.525) 26.9,78.525 v1(27.975,77.45)
  Top Layer w0.292: v1(20.2,82.1) 20.2,82.163 20.45,82.413 J1.A9 ; v1(20.3,85.25) 20.696,84.854 20.696,84.384 J1.B4 ; J1.B9 23.204,84.384 23.204,84.937 23.5,85.233 v1(23.5,85.263) ; J1.A4@23.448,83.112 J1.A4 23.454,83.106 23.454,82.571 v1(23.7,82.325)
  Bottom Layer w0.152: v1(19.625,78.85) R1.2
  Bottom Layer w0.254: R5.2 22.675,78.175 23.7,79.2 v1(23.7,82.325) ; U1.24 27.1,76.575 v1(27.975,77.45) C4.2
  Bottom Layer w0.292: 20.2,82.408 20.2,82.325 v1@20.25,82.375 ; v1@20.25,85.2 v1(20.3,85.25) v1@20.35,85.2
  other v1: 19.15,62.975 19.75,62.975 19.575,82.1
VREG_1V2: C6.2 U1.21 | length 2.4
  Bottom Layer w0.254: C6.2 24.75,77.675 25.6,76.825 U1.21
VREG_2V7: C5.2 U1.23 | length 2.2
  Bottom Layer w0.254: U1.23 26.6,77.247 26.9,77.547 C5.2
VSNK: C8.1 C19.2 D2.1 J2.1 J2.3 J2.5 Q1.5 Q1.6 Q1.7 Q1.8 R4.1 | length 10.1
  Bottom Layer w0.152: D2.1 C8.1 19.62,77.645 R4.1
  Bottom Layer w0.584: J2.3 10.6,44.775 10.6,48.88 11.327,49.607 C19.2@11.343,49.607
  Bottom Layer w0.6: v1(16.6,76.175) D2.1
  other v1: 12.25,44.45 12.875,44.45 13.5,44.45 12.25,45.1 12.875,45.1 13.5,45.1 14.9,80.65 15.55,80.65 16.2,80.65 14.9,81.3 15.55,81.3 16.2,81.3
VSNK_GATE: Q1.4 R1.1 R2.2 R3.2 | length 8.4
  Bottom Layer w0.152: Q1.4 15.175,83.75 18.201,80.724 18.451,80.724 R2.2 R1.1 R3.2
WII_DATA_N: J2.11 U4.4 | length 13.6
  Top Layer w0.244: v1(12.9,42.65) 12.968,42.582 13.35,42.582 13.569,42.364 15.438,42.364 15.946,42.872 20.895,42.872 22.055,44.032 22.307,44.032 v1(22.375,44.1)
  Bottom Layer w0.244: J2.11 11.078,42.803 11.735,42.803 11.771,42.84 12.614,42.84 12.804,42.65 v1(12.9,42.65) v1@13.026,42.776 ; U4.4 21.872,42.973 21.872,43.336 21.804,43.403 21.804,43.782 22.055,44.032
WII_DATA_P: J2.9 U4.3 | length 13.5
  Top Layer w0.244: v1(13.414,43.164) 13.414,43.068 13.58,42.902 13.58,42.876 13.722,42.734 15.284,42.734 15.792,43.242 20.741,43.242 21.793,44.294 21.793,44.546 v1(21.861,44.614)
  Bottom Layer w0.244: J2.9 11.078,43.247 11.735,43.247 11.771,43.21 13.368,43.21 v1(13.414,43.164) ; U4.3 21.375,43.35 21.434,43.409 21.434,43.935 21.793,44.294
pads on no net: J1.A2 J1.A3 J1.A8 J1.A10 J1.A11 J1.B2 J1.B3 J1.B8 J1.B10 J1.B11 J2. J3. U1.14 U1.15 U1.17 U1.20 U5.1 U6.4

## Polygon pours and split planes (outlines as drawn)
GND on Top Layer "GND_L-01_P-001" (solid, remove dead copper, pour order 153): 10,21.05 33.9,21.05 33.9,90.5 10,90.5
VSNK on Top Layer "VSNK_L-01_P-001" (solid, pour order 152): 11.925,45.425 11.925,44.125 15.825,44.125 16.95,45.25 16.95,81.625 14.575,81.625 14.575,80.325 15.65,80.325 15.65,45.8 15.275,45.425
VBUS on Top Layer "VBUS_L-01_P-005" (solid, pour order 151): 20.075,62.65 20.075,77.5 20.525,77.95 20.525,82.425 19.25,82.425 19.25,78.45 18.825,78.025 18.825,62.65
GND on Bottom Layer "GND_L-02_P-001" (solid, remove dead copper, pour order 160): 10,21.05 33.9,21.05 33.9,90.5 10,90.5
VSNK on Bottom Layer "VSNK_L-02_P-001" (solid, pour order 158): 11.375,80.325 16.525,80.325 16.525,81.625 11.375,81.625
VBUS on Bottom Layer "VBUS_L-01_P-006" (solid, pour order 159): 20.725,84.825 20.525,84.625 20.525,81.775 19.25,81.775 19.25,84.825 14.675,84.825 13.125,84.825 13.125,83.4 11.425,83.4 11.425,86.525 13.975,86.525 20.725,86.525 22.825,86.525 24.125,85.225 24.125,82 23.275,82 23.275,84.875 22.475,85.675 20.725,85.675
VBUS on Bottom Layer "VBUS_L-02_P-002" (solid, pour order 155): 20.075,58.7 20.075,63.3 18.825,63.3 18.825,57.95 21.175,57.95 21.175,58.7
5V_USBC on Bottom Layer "5V_USBC_L-01_P-003" (solid, pour order 156): 25.9,56.8 22.4,56.8 22.4,55.725 25.9,55.725
VSNK on Bottom Layer "VCHRG_L-01_P-001" (solid, pour order 157): 10.3,44.125 13.85,44.127 13.85,45.425 10.3,45.425
5V_PMS on Bottom Layer "5V_PMS_L-01_P-005" (solid, pour order 154): 14,44.625 14,45.425 14.4,45.425 15.125,45.425 15.5,45.425 15.5,44.625

## Keep-outs
Bottom Layer:
  region: 26.375,67.887 26.45,67.887 26.45,67.812 26.375,67.812
  region: 27.95,65.5 28.025,65.5 28.025,65.425 27.95,65.425

## Silkscreen, mask and mechanical layers (free items; w line width, h text height)
Top Overlay:
  text "Wii USBC / Rev 1" at 11.19,81.875 h0.76
Mechanical 1:
  the board outline again, w0.1